# Altium PCB LoadCell.PcbDoc
Units mm, origin at the board's own origin, x right, y up, seen from the top; angles counter-clockwise.
Board outline 19.81 x 13.59 mm, 2 copper layers (Top Layer, Bottom Layer); 18 components, 10 nets, 51 pads, 15 vias.
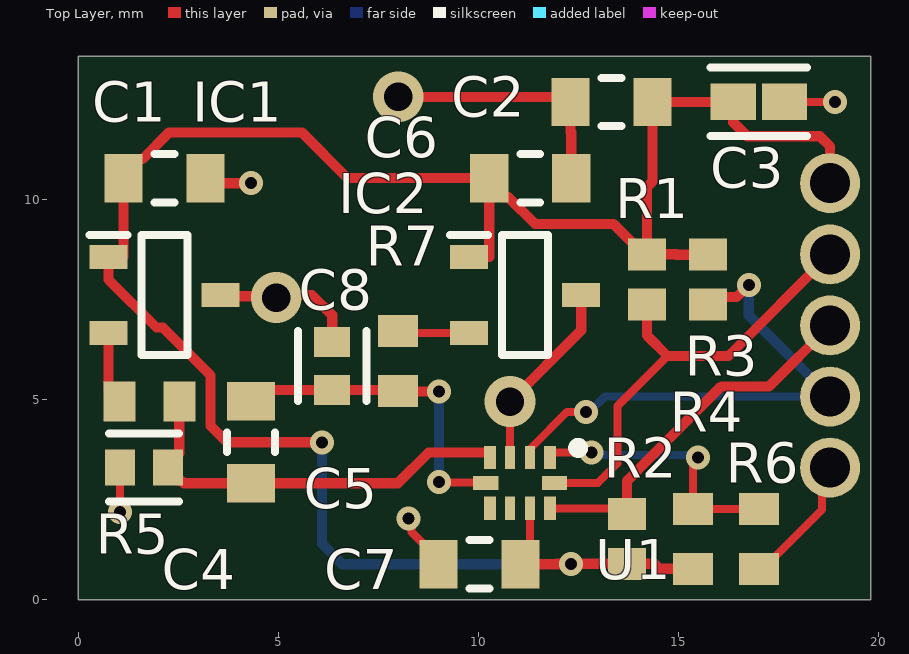
[diagram p0: Top Layer view]
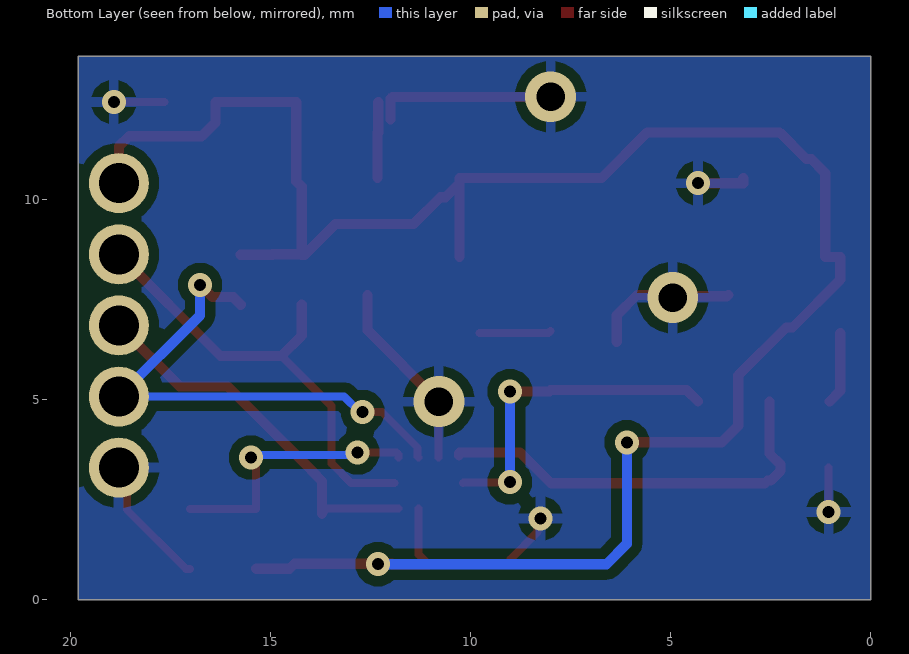
[diagram p1: Bottom Layer view, seen from below]
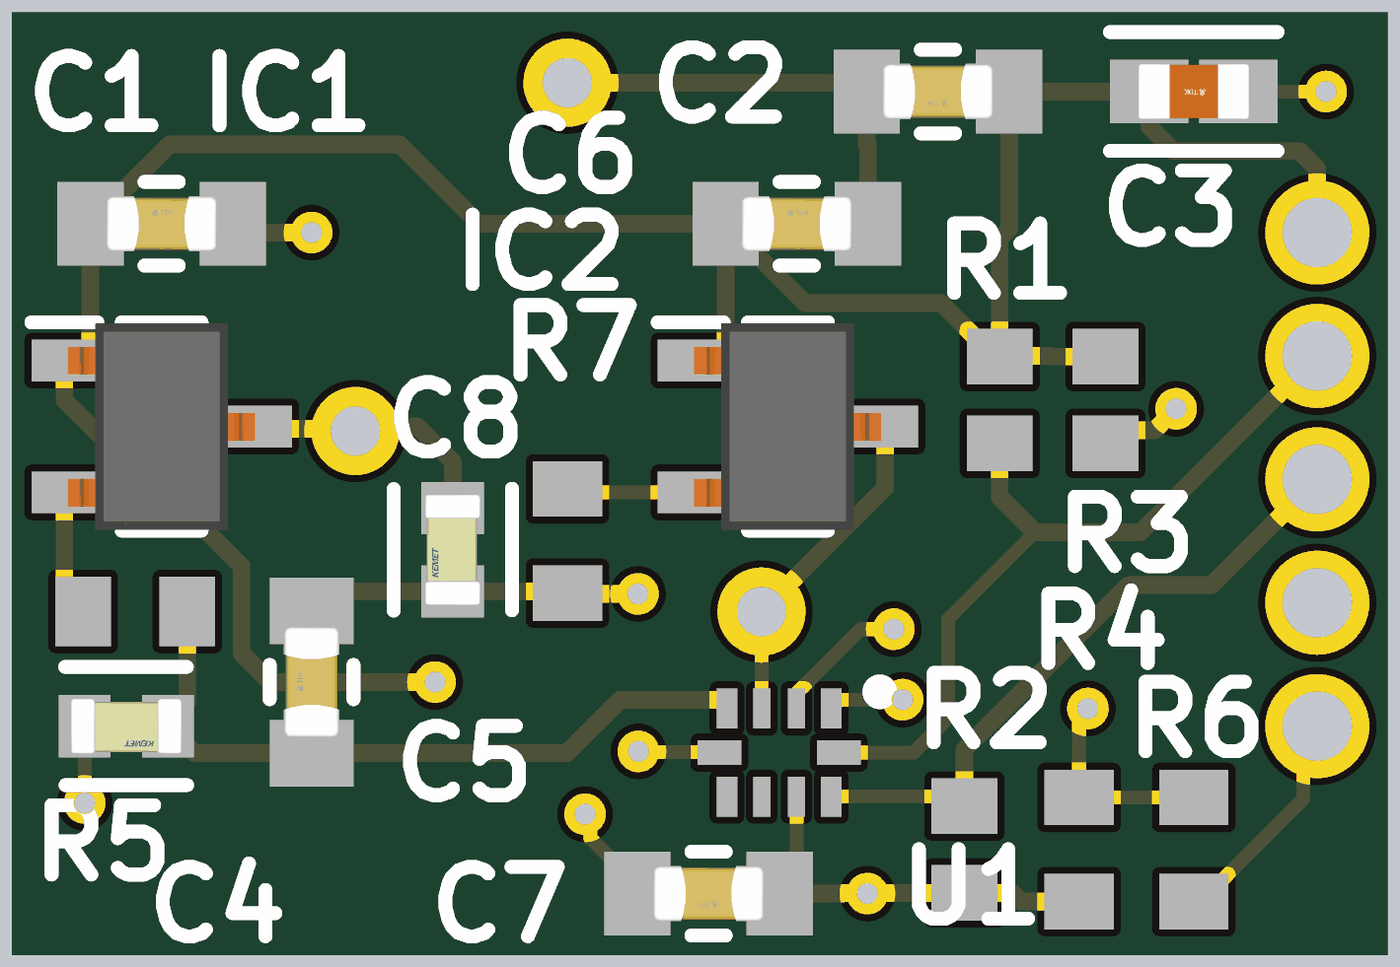
[diagram p2: 3D render of the assembled board from above, using the file's embedded part models]

## Layer stack, top to bottom
Top Solder: solder mask 0.0102, Solder Resist, Dk 3.5
Top Layer: signal copper 0.0356
Dielectric 1: dielectric 0.32, FR-4, Dk 4.8
Bottom Layer: signal copper 0.0356
Bottom Solder: solder mask 0.0102, Solder Resist, Dk 3.5

## Board outline
0,0 0,13.589 19.812,13.589 19.812,0

## Design rules (kind name [scope] priority, off if disabled: settings)
Clearance [All] p1: gap=0.254 ignorepadtopadclearanceinfootprint=FALSE
PolygonConnect [All] p1: connectstyle=Relief reliefconductorwidth=0.254 reliefentries=4 polygonreliefangle="90 Angle" airgapwidth=0.254
RoutingVias [All] p1: holewidth=0.3 width=0.45 viastyle="Through Hole" minholewidth=0.3 minwidth=0.45 maxholewidth=0.711 maxwidth=1.27
SolderMaskExpansion [All] p1: expansion=0.102 istentingtop=FALSE
SupplyNets "Schematic Supply Nets_1" [InNet('GND')] p1: voltage=0.000
SupplyNets "Schematic Supply Nets" [InNet('+5V')] p2: voltage=0.000
Width [All] p1: maxlimit=0.3 minlimit=0.2 preferedwidth=0.2
30 further rules are at their usual default settings.

## Components (designator, comment, footprint, x,y, rotation, side; value= is the part's Value field where it differs from the comment)
C1 "CGA3E2X7R1H104K080AA" FP-CGA3E-0_3-0_1-IPC_A 2.159,10.541 r0 top
C2 "CGA3E2X7R1H104K080AA" FP-CGA3E-0_3-0_1-IPC_A 13.335,12.446 r180 top
C3 "C1608X5R1H105K080AB" FP-C1608-080-0_1-IPC_B 17.018,12.446 r180 top
C4 "C0603C473K5RACTU" FP-C0603C-CF-MFG 1.651,3.302 r180 top value="47,000 pF"
C5 "CGA3E2X7R1H104K080AA" FP-CGA3E-0_3-0_1-IPC_A 4.318,3.937 r90 top
C6 "CGA3E2X7R1H104K080AA" FP-CGA3E-0_3-0_1-IPC_A 11.303,10.541 r0 top
C7 "CGA3E2X7R1H104K080AA" FP-CGA3E-0_3-0_1-IPC_A 10.033,0.889 r180 top
C8 "C0603C473K5RACTU" FP-C0603C-CF-MFG 6.35,5.842 r90 top value="47,000 pF"
IC1 "A1308LLHLX-2-T" SOT95P285X113-3N 2.159,7.62 r0 top
IC2 "A1308LLHLX-2-T" SOT95P285X113-3N 11.176,7.62 r0 top
R1 "CRCW06032K20FKEA" RESC1609X50X30NL10T20 14.224,8.001 r90 top value=2.2k
R2 "CRCW06032K20FKEA" RESC1609X50X30NL10T20 13.716,1.524 r270 top value=2.2k
R3 "CRCW06032K20FKEA" RESC1609X50X30NL10T20 15.748,8.001 r90 top value=2.2k
R4 "RC0603JR-070RL" RESC1608X55X25ML10T15 15.367,1.524 r270 top
R5 "RC0603FR-07150RL" RESC1608X55X25ML10T15 1.778,4.953 r0 top value=150
R6 "RC0603JR-070RL" RESC1608X55X25ML10T15 17.018,1.524 r90 top
R7 "RC0603FR-07150RL" RESC1608X55X25ML10T15 8.001,5.969 r270 top value=150
U1 "ADS1115IRUGR" TI-RUG10_V 11.049,2.921 r180 top

## Footprints (in the part's own frame and the unit in brackets; to place one, negate y for a bottom-side part, rotate by r counter-clockwise, add the part's x,y. Pads: shape width x height; smd on the part's side, far side on the other; paste and mask are expansions set on the pad)
FP-C0603C-CF-MFG [mm]
  rect 0.75x0.9 smd paste+0 mask+0: 1(-0.6,0) 2(0.6,0)
  silkscreen extent -0.87,-0.85 0.88,0.85, body extent -1.2,-0.6 1.2,0.6, height 0.25
FP-C1608-080-0_1-IPC_B [mm]
  rect 1.131x0.912 smd paste+0 mask+0: 1(-0.641,0) 2(0.641,0)
  silkscreen extent -1.21,-0.86 1.21,0.86, body extent -1.46,-0.71 1.46,0.71, height 0.25
FP-CGA3E-0_3-0_1-IPC_A [mm]
  rect 0.956x1.206 smd paste+0 mask+0: 1(-1.025,0) 2(1.025,0)
  silkscreen extent -0.25,-0.6 0.25,0.6, body extent -2,-1.1 2,1.1, height 0.25
RESC1608X55X25ML10T15 [mm] "Chip Resistor, 2-Leads, Body 1.60x0.80mm, IPC Low Density"
  rect 0.8x1 smd: 1(-0.75,0) 2(0.75,0)
  body extent -0.85,-0.45 0.85,0.45, height 0.55
RESC1609X50X30NL10T20 [mm] "Chip Resistor, 2-Leads, Body 1.55x0.85mm, IPC Medium Density"
  rect 0.8x0.95 smd: 1(-0.625,0) 2(0.625,0)
  body extent -0.82,-0.48 0.82,0.48, height 0.5
SOT95P285X113-3N [mm]
  rect 0.95x0.6 smd: 1(-1.4,0.95) 2(-1.4,-0.95) 3(1.4,0)
  silkscreen extent -1.87,-1.5 0.58,1.5, body extent -1.35,-1.49 1.35,1.48, height 1.06
TI-RUG10_V [mm] "QFN, 10-Leads, Body 2x1.5mm"
  rect 0.3x0.58 smd: 1(-0.75,-0.635) 4(0.75,-0.635) 6(0.75,0.635) 9(-0.75,0.635)
  rect 0.25x0.58 smd: 2(-0.25,-0.635) 3(0.25,-0.635) 7(0.25,0.635) 8(-0.25,0.635)
  rect 0.63x0.35 smd: 5(0.86,0) 10(-0.86,0)
  silkscreen extent -1.58,-1 -1.33,-0.75, body extent -1,-0.75 1,0.75, height 0.4

## Part data
C1 C2 C5 C6 C7: library part CMP-2000-07546-2, "Cap Ceramic 100nF 50V X7R 10% Pad SMD 0603 +125°C Automotive T/R", Capacitance=100nF, Case Code (Imperial)=0603, Case Code (Metric)=1608, Dielectric=X7R, Max Operating Temperature=125°C, Min Operating Temperature=-55°C, Package Quantity=1, Ratings=AEC-Q200, Tolerance=10%, Voltage=50V, Case/Package=0603, Composition=Ceramic, Depth=0.8mm, Height=0.8mm, Lead Free="Lead Free", Length=1.6mm, Mount="Surface Mount", Packaging="Tape and Reel", Radiation Hardening=No, REACH SVHC="No SVHC", Termination=SMD/SMT, Thickness=0.035inch, Voltage Rating=50V, Voltage Rating (DC)=50V, Weight=7.1E-05oz, Width=0.8mm
C3: library part CMP-2000-06025-2, "Multilayer Ceramic Capacitors 1μF ±10% 50V X5R SMD 0603", Capacitance=1uF, Case Code (Imperial)=0603, Case Code (Metric)=1608, Dielectric=X5R, Dielectric Material=Ceramic, Max Operating Temperature=85°C, Min Operating Temperature=-55°C, Package Quantity=1, Tolerance=10%, Voltage=50V, Case/Package=0603, Construction=Flat, Depth=0.8mm, Height=0.8mm, Lead Free="Lead Free", Length=1.6mm, Mount="Surface Mount", Number of Pins=2, Packaging="Tape and Reel", Radiation Hardening=No, REACH SVHC="No SVHC", Resistor Type=Ceramic, RoHS Compliant=Yes, Series=C, Termination=SMD/SMT, Thickness=0.035inch, Voltage Rating=50V, Voltage Rating (DC)=50V, Weight=7.1E-05oz, Width=0.031inch
C4 C8: library part CMP-2006-03232-2, "CAP CER 0.047UF 50V 10% X7R 0603", Capacitance="47,000 pF", Manufacturer=KEMET, Package=C0603C-CF, Temperature="-55°C to +125°C", Temperature Characteristic=X7R, Temperature Coefficient=30ppm/°C, Temperature Range High=+125°C, Temperature Range Low=-55°C, Tolerance=0.1, Voltage Rating="50 V", Automotive=Yes, Automotive Grade="Grade 1", Category=Cap, ComponentLink2Description=Datasheet, ComponentLink2URL=https://api.kemet.com/component-edge/download/datasheet/C0603C100J5GACAUTO.pdf, Device Class L1="Passive Components", Device Class L2=Capacitors, Device Class L3="Ceramic Capacitors", Digikey Description="CAP CER 0.047UF 50V 10% X7R 0603", Height=0.87mm, Lead Free=Yes, Manufacturer Part Number=C0603C473K5RACTU, Material=Ceramic, Mouser Description="Multilayer Ceramic Capacitors MLCC - SMD/SMT 50volts 47000pF X7R 10%", Octopart=https://octopart.com/c0603c473k5ractu-kemet-9138594, RoHS=TRUE
IC1 IC2: "Integrated Circuit", Manufacturer_Name="Allegro Microsystems", Mouser Part Number=250-A1308LLHLX-2-T, Arrow Part Number=A1308LLHLX-2-T, Arrow Price/Stock=https://www.arrow.com/en/products/a1308llhlx-2-t/allegro-microsystems?region=nac, Datasheet Link=http://www.allegromicro.com/~/media/files/datasheets/a1308-9-datasheet.pdf, Height=1.13mm, Manufacturer_Part_Number=A1308LLHLX-2-T, Mouser Price/Stock=https://www.mouser.co.uk/ProductDetail/Allegro-MicroSystems/A1308LLHLX-2-T?qs=pUKx8fyJudC4S4ikpanetA%3D%3D
R1 R2 R3: library part CMP-2000-03167-1, Manufacturer="Vishay Dale", Part Number=CRCW06032K20FKEA
R4 R6: library part CMP-2100-03667-1, "Chip Resistor, 0 Ohm, +/- 5%, 0.1 W, -55 to 155 degC, 0603 (1608 Metric), RoHS, Tape and Reel", Case Code (Imperial)=0603, Case Code (Metric)=1608, Manufacturer=Yageo, Max Operating Temperature=155degC, Min Operating Temperature=-55degC, Package Description="2-Pin Surface Mount Device, Body 1.6 x 0.8 mm", Package Quantity=5000, Power Rating=100mW, Resistance=0, Temperature Coefficient=200ppm/degreesC, Tolerance=5%, Voltage Rating=50V, Case/Package=0603, Composition=ThickFilm, Contact Plating=Tin, Datasheet URL=http://www.yageo.com/NewPortal/yageodocoutput?fileName=/pdf/R-Chip/PYu-RC_Group_51_RoHS_L_5.pdf, Datasheet Version="Rev. 5, 10/2016", Depth=0.8mm, Height=0.45mm, Lead Free=LeadFree, Length=1.6mm, Manufacturer URL=http://www.yageo.com/, Military Standard=Not, Number of Pins=2, Package Reference=0603, Packaging=TapeandReel, Radiation Hardening=No, REACH SVHC=NoSVHC, RoHSCompliant=true, Termination=SMD/SMT, Voltage Rating (DC)=50V, Width=0.8mm
R5 R7: library part CMP-1659-00057-1, "Chip Resistor, 150 Ohm, +/- 1%, 0.1 W, -55 to 155 degC, 0603 (1608 Metric), RoHS, Tape and Reel", Case\Package=Radial, Colour=Green, Forward Voltage="2.2 V", Package Quantity=1000, ComponentLink1Description="Manufacturer URL", ComponentLink1URL=http://www.yageo.com/, ComponentLink2Description=Datasheet, ComponentLink2URL=http://www.yageo.com/documents/recent/PYu-RC_Group_51_RoHS_L_04.pdf, DatasheetVersion="Rev. 4, 02/2016", Height="8.6 mm", Illumination Colour=Green, Lens Style=Clear, Luminous Intensity="200 mcd", Mount="Through Hole", Nominal Vf="2.2 V", PackageDescription="2-Pin Surface Mount Device, Body 1.6 x 0.8 mm", PackageReference=0603, Packaging=Bulk, RoHSCompliant=true, Viewing Angle="20 degrees"
U1: library part CMP-0003-00970-1, "16-Bit ADC with Integrated Multiplexer, PGA, Comparator, Oscillator, and Reference, -40 to 125 degC, 10-pin HandDrawn (RUG10), Green (RoHS & no Sb/Br)", Analog Voltage AV/DD(Max)(V)=5.5, Analog Voltage AV/DD(Min)(V)=2, Manufacturer="Texas Instruments", # Input Channels=4, Architecture=Delta-Sigma, Code_JEDEC=MO-288, ComponentLink1Description="Manufacturer URL", ComponentLink1URL=http://www.ti.com/, ComponentLink2Description=Datasheet, ComponentLink2URL=http://www.ti.com/general/docs/lit/getliterature.tsp?genericPartNumber=ADS1115&fileType=pdf, ComponentLink3Description="Package Specification", ComponentLink3URL=http://www.ti.com/litv/pdf/mpqf216a, DatasheetVersion=SBAS444B, Digital Supply(Max)(V)=5.5, Digital Supply(Min)(V)=2, Eco-Plan="Green (RoHS & no Sb/Br)", INL(Max)(+/-LSB)=1, Interface="Serial I2C", Mounting Technology="Surface Mount", PackageDescription="10-Pin Plastic Quad Flatpack, Body 1.5 x 2 mm, Pitch 0.5 mm", PackageReference=RUG10, PackageVersion="4208528-3/B, 04/2008", PartNumber=ADS1115IRUGR, Resolution(Bits)=16, Sample Rate (max)(SPS)=860, SubFamily="Precision ADC (<=10MSPS)"

## Free pads (board coordinates)
  round 1.5 hole 1 unplated: 3(18.796,10.414) 4(18.796,8.636) 5(18.796,6.858) 6(18.796,5.08) 7(18.796,3.302)

## Via types
v1: diameter 0.6, hole 0.3, Top Layer to Bottom Layer, 12 vias
v2: diameter 1.27, hole 0.711, Top Layer to Bottom Layer, 3 vias

## Nets (pads, with @x,y where several pads share a name; then routed paths per layer and width w, separated by ;. In a path a pad name is that pad's centre, name@x,y a point inside that pad or via, vN(x,y) a via of type N, cw(c..) or ccw(c..) an arc to the next point about the centre after c; other vN are vias at no path point)
+5V: C1.1 C2.1 C3.2 C6.1 C7.1 IC1.1 IC2.1 pad.3 R1.2 R2.2 R3.2 R4.2 U1.8 | length 53.8
  Top Layer w0.2: C7.1 11.299,1.13 U1.8
  Top Layer w0.254: v1(6.096,3.937) 3.723,3.937 3.309,4.351 3.309,5.611 2.112,6.807 1.956,6.807 0.759,8.004 IC1.1 1.134,8.57 C1.1 1.134,10.666 1.485,11.017 1.61,11.017 2.277,11.684 5.588,11.684 6.731,10.541 C6.1 C6.1@10.278,10.416 ; 10.278,8.57 C6.1@10.278,10.416 ; C7.1 11.963,0.889 11.973,0.899 R2.2 14.404,0.899 14.529,0.774 R4.2 ; R3.2 14.961,8.626 14.951,8.636 R1.2@14.224,8.636 ; pad.3 18.796,11.334 18.542,11.588 16.728,11.588 16.377,11.938 C3.2 C2.1 14.36,10.465 14.224,10.329 R1.2@14.224,8.636 ; C6.1@10.278,10.416 10.629,10.065 10.754,10.065 11.421,9.398 13.377,9.398 14.149,8.626 R1.2 R1.2@14.224,8.636
  Bottom Layer w0.254: v1(6.096,3.937) 6.096,1.397 6.604,0.889 v1(12.319,0.889)
ADDR: R4.1 R6.2 U1.1 | length 6.8
  Top Layer w0.2: U1.1 11.799,3.633 11.849,3.683 v1(12.827,3.683) ; v1(15.494,3.556) 15.367,3.429 R4.1 R6.2
  Bottom Layer w0.2: v1(12.827,3.683) 12.89,3.619 15.43,3.619 v1(15.494,3.556)
ALERT: pad.6 R3.1 U1.2 | length 13.1
  Top Layer w0.2: U1.2 11.324,3.581 11.324,3.8 12.223,4.699 v1(12.7,4.699)
  Top Layer w0.254: R3.1 15.937,7.565 16.455,7.565 v1(16.764,7.874)
  Bottom Layer w0.2: v1(12.7,4.699) 12.787,4.699 13.168,5.08 pad.6
  Bottom Layer w0.254: v1(16.764,7.874) 16.764,7.112 pad.6
GND: C1.2 C2.2 C3.1 C4.2 C6.2 C7.2 C8.2 IC1.3 IC2.3 pad.7 R6.1 U1.3 | length 23.5
  Top Layer w0.2: v1@1.016,2.159 v1(1.051,2.194) C4.2 ; v1(8.255,2.032) 8.332,1.955 8.332,1.69 9.008,1.014 C7.2 ; v2(10.795,4.953) 10.799,4.949 U1.3 ; R6.1 17.118,0.774 18.596,2.252 18.596,3.102 pad.7 ; C3.1 v1(18.923,12.446)
  Top Layer w0.254: C1.2 3.184,10.414 v1(4.318,10.414) ; IC1.3 3.592,7.587 4.916,7.587 v2(4.949,7.554) ; v2@4.949,7.62 5.842,7.62 6.35,7.112 C8.2 ; v2(8.001,12.573) 11.959,12.573 12,12.531 C2.2@12,12.011 ; v2(10.795,4.953) 12.576,6.734 IC2.3 ; C2.2 12.31,11.702 ; C6.2 12.328,11.666 ; 12.31,11.702 12.31,11.684 12.328,11.666 ; 12.31,11.702 12.328,11.684 12.328,11.666
NetC4_1: C4.1 C5.1 R5.2 U1.4 | length 10.4
  Top Layer w0.254: R5.2 2.528,3.654 2.251,3.377 C4.1 2.251,3.227 2.499,2.979 2.574,2.979 2.641,2.912 C5.1 7.992,2.912 8.763,3.683 10.276,3.683 10.293,3.666 U1.4@10.293,3.604
NetC5_2: C5.2 C8.1 R7.2 U1.5 | length 8.3
  Top Layer w0.2: v1(9.023,2.938) 9.031,2.93 10.18,2.93 U1.5
  Top Layer w0.254: C5.2 4.598,5.242 8.001,5.242 8.036,5.207 v1(9.017,5.207)
  Bottom Layer w0.254: v1@9.017,2.921 9.02,2.924 9.02,5.204 v1(9.017,5.207)
NetIC1_2: IC1.2 R5.1 | length 1.8
  Top Layer w0.254: IC1.2 0.759,5.222 R5.1
NetIC2_2: IC2.2 R7.1 | length 1.8
  Top Layer w0.2: R7.1 8.05,6.67 IC2.2
SCL: pad.4 R1.1 U1.10 | length 11.6
  Top Layer w0.2: U1.10 12.99,2.921 13.481,3.412 13.481,4.845 14.732,6.096
  Top Layer w0.254: R1.1 14.224,6.604 14.732,6.096 16.256,6.096 pad.4
SDA: pad.5 R2.1 U1.9 | length 9.5
  Top Layer w0.2: U1.9 13.579,2.286 R2.1
  Top Layer w0.254: R2.1 13.716,2.967 13.962,3.213 13.962,3.218 16.078,5.334 17.272,5.334 pad.5
pads on no net: U1.6 U1.7

## Polygon pours and split planes (outlines as drawn)
GND on Bottom Layer "GND_L02_P000" (solid, pour order 0): 0,13.589 19.812,13.589 19.812,0 0,0

## Silkscreen, mask and mechanical layers (free items; w line width, h text height)
Mechanical 1:
  the board outline again, w0.127

## Dimensions
0,0 to 19.812,0 on Mechanical 1
19.812,13.589 to 19.812,0 on Mechanical 1
3.559,7.62 to 12.576,7.62 on Mechanical 1